# Altium PCB MotorControl-V4.0.PcbDoc (part 2 of 2)
Units mm, origin at the board's own origin, x right, y up, seen from the top; angles counter-clockwise.
Board outline 110 x 100 mm, 4 copper layers (Top Layer, GND-A, VCC-A, Bottom Layer); 241 components, 149 nets, 694 pads, 355 vias.
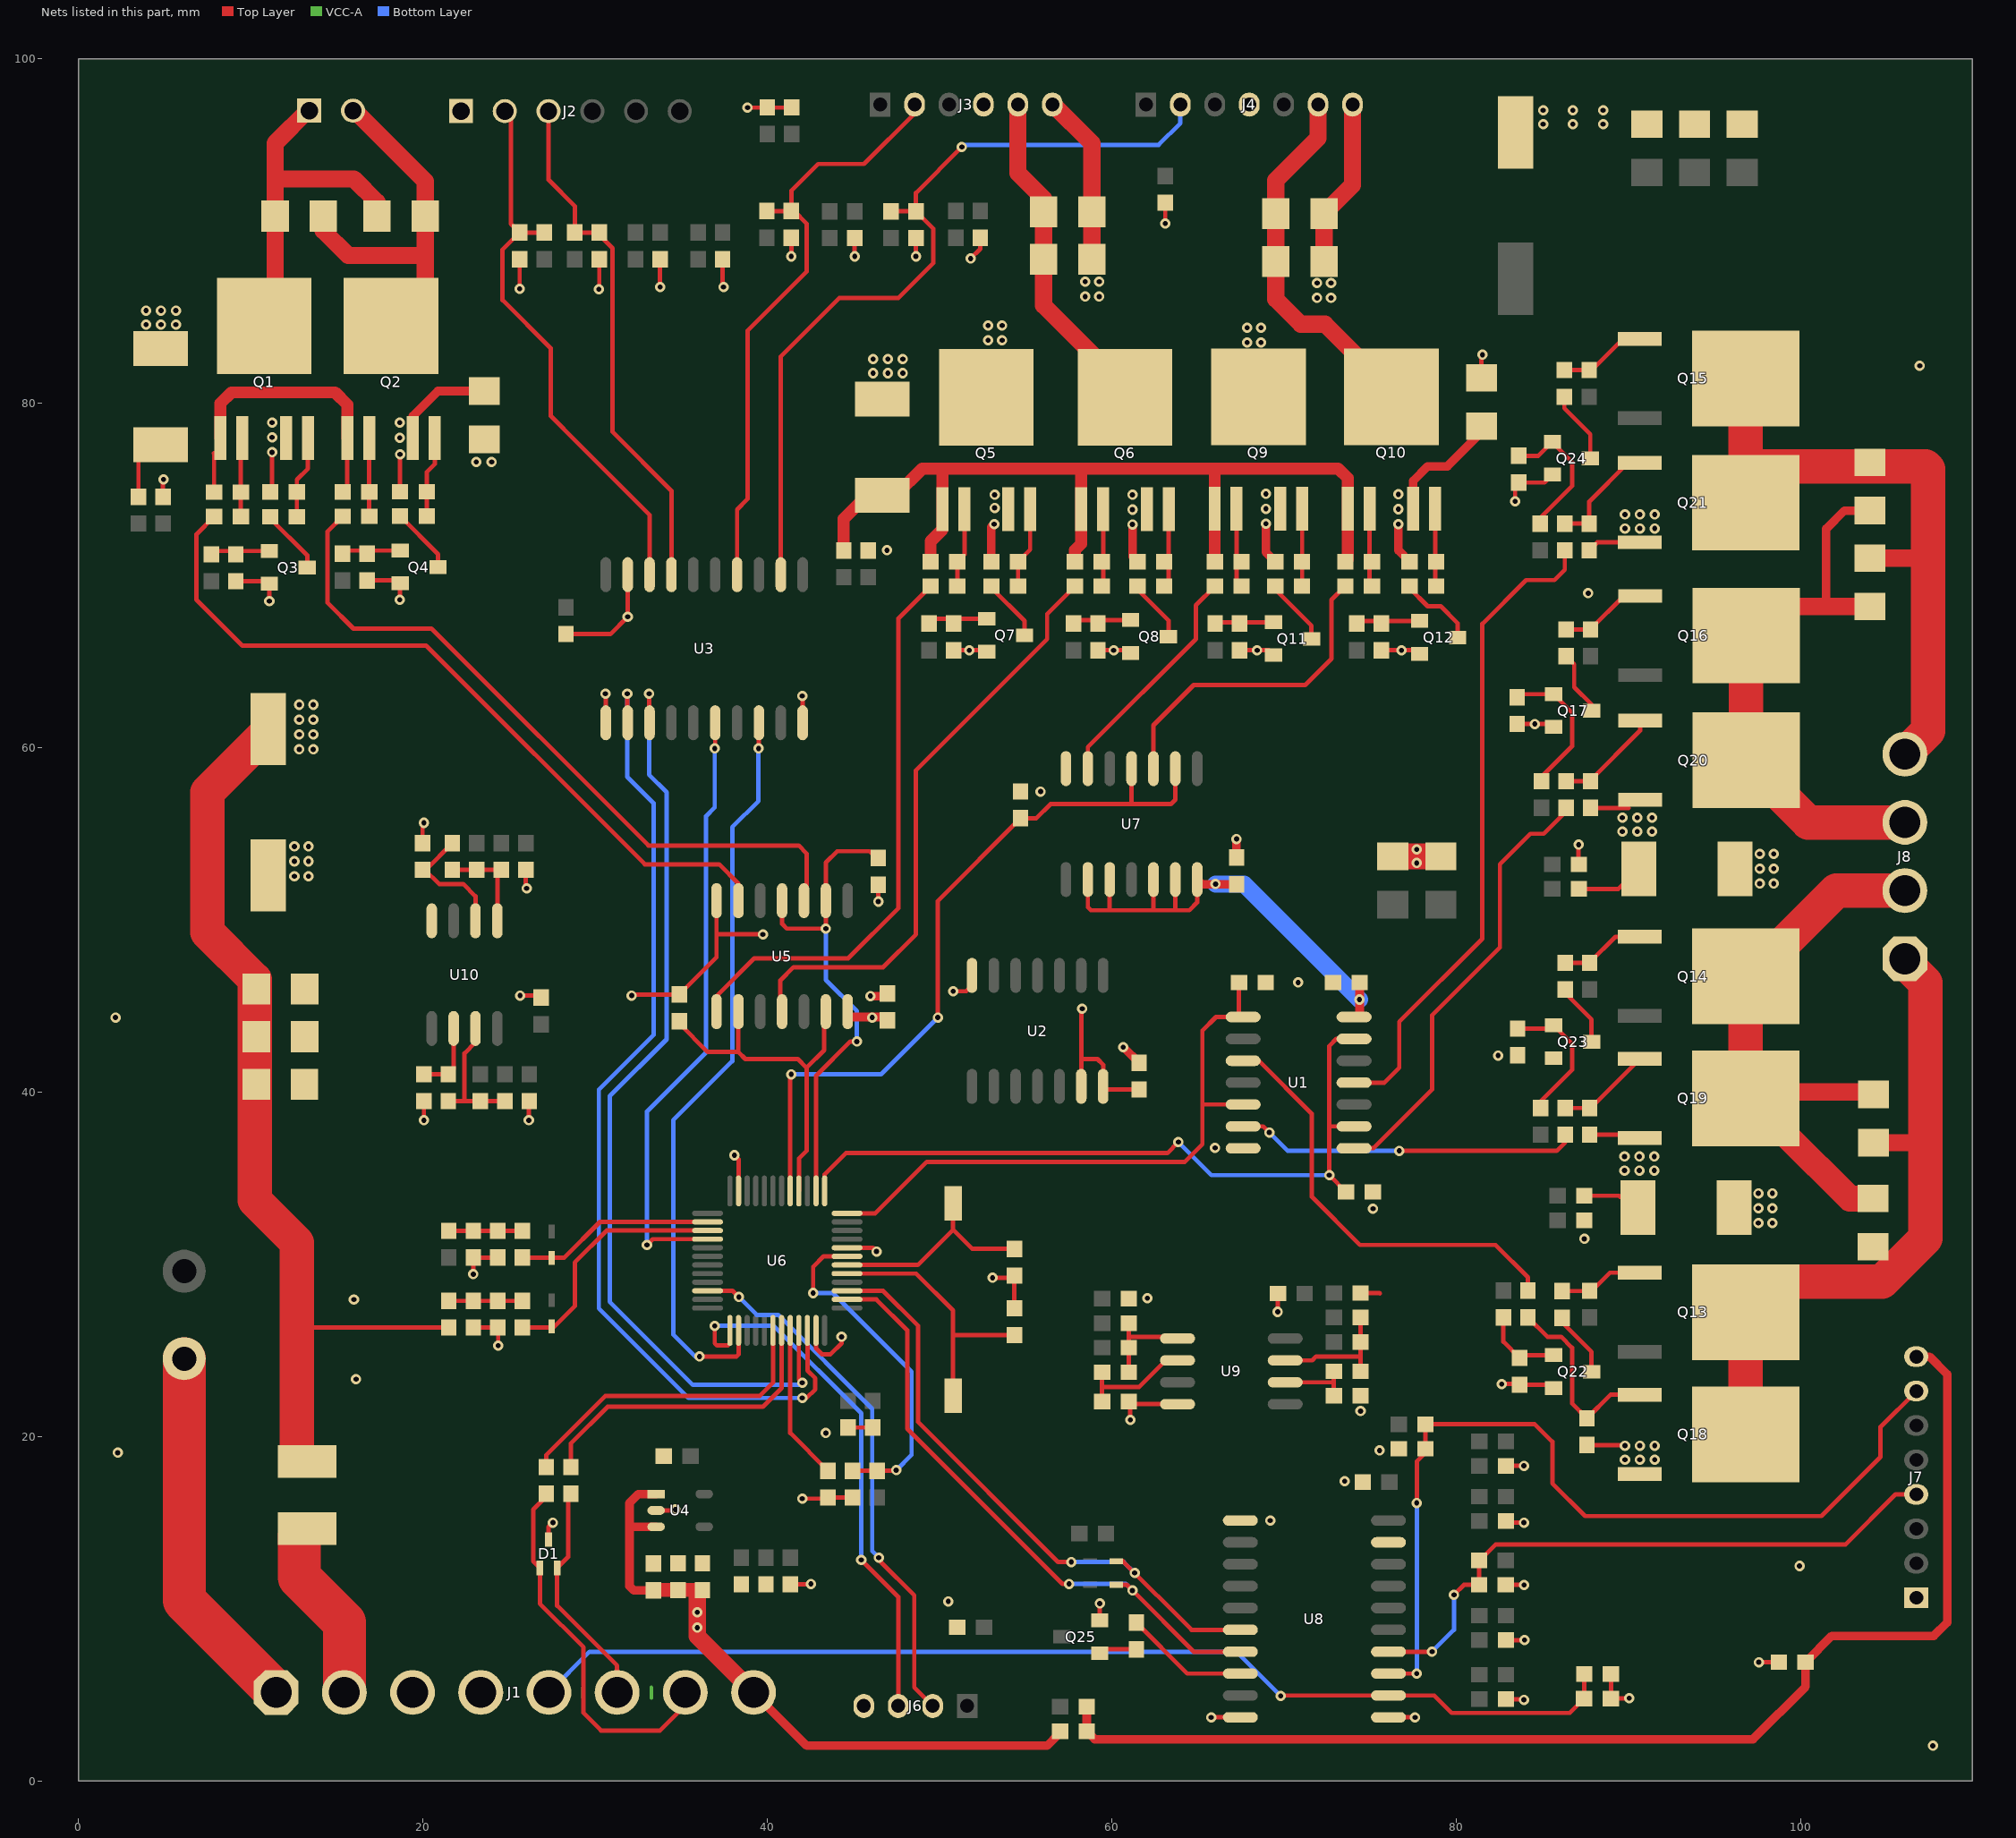
[diagram p4: the nets of this part, all layers, seen from the top]

## Via types
v1: diameter 0.6, hole 0.3, Top Layer to Bottom Layer, 352 vias
v2: diameter 0.6, hole 0.3, Top Layer to Bottom Layer, tented both sides, 3 vias

## Nets (pads, with @x,y where several pads share a name; then routed paths per layer and width w, separated by ;. In a path a pad name is that pad's centre, name@x,y a point inside that pad or via, vN(x,y) a via of type N, cw(c..) or ccw(c..) an arc to the next point about the centre after c; other vN are vias at no path point) (continued)
GND: C1.2 C2.2 C3.2 C4.2 C5.2 C6.2 C7.2 C8.2 C9.2 C10.2 C11.1 C12.1 C13.2 C14.1 C15.2 C16.1 C17.1 C18.2 C19.2 C20.1 C21.2 C22.2 C23.2 C24.2 C25.2 C26.1 C27.1 C29.1 C30.2 C31.2 C32.2 C33.2 C34.2 C35.2 C36.2 C37.2 C38.2 C39.2 C40.2 C41.2 C43.2 C44.2 C46.2 C47.2 C48.2 C49.2 C50.2 C51.2 C52.2 C53.2 C54.2 C57.2 C58.2 C59.2 C60.2 C61.2 C62.2 D1.3 J1.3 J1.4 J2.1 J3.4 J4.4 J6.4 J7.1 Q3.2 Q4.2 Q7.2 Q8.2 Q11.2 Q12.2 Q17.2 Q22.2 Q23.2 Q24.2 Q25.2 R5.1 R6.1 R7.1 R8.2 R11.2 R13.2 R20.2 R24.2 R28.1 R31.2 R32.2 R34.1 R36.1 R53.1 R56.1 R62.1 R71.1 R74.1 R77.2 R84.2 R85.2 R86.1 R87.1 R101.1 R103.1 R106.1 R109.1 R110.1 R120.2 R121.2 R127.1 R128.1 U1.7 U2.7 U3.1 U3.10 U3.19 U4.2 U5.7 U6.8 U6.23 U6.47 U7.7 U8.1 U8.10 U8.11 U8.19 U9.4 U10.4 | length 120.3
  Top Layer w0.254: C25.2@4.917,74.553 v1@4.917,75.474 ; R28.1@9.144,69.659 10.94,69.659 Q3.2@11.092,69.507 v1(11.092,68.496) ; R31.2@16.766,69.7 18.52,69.7 Q4.2@18.687,69.533 18.687,68.598 v1(18.669,68.58) ; R127.1@19.99,54.445 19.99,55.55 v1(20.066,55.626) ; v1(20.066,38.354) R128.1@20.066,39.471 ; C43.2@22.936,26.314 R62.1@24.359,26.314 24.384,26.289 v1(24.384,25.273) ; v1(22.936,29.413) R101.1@22.936,30.378 C49.2@24.359,30.378 ; v1(25.629,86.639) C6.2@25.629,88.354 ; v1(25.654,45.593) 26.759,45.593 C50.2@26.873,45.479 C50.2@26.987,45.593 ; v1@25.984,51.74 C53.2@25.984,52.895 ; v1(26.162,38.354) 26.162,39.446 C54.2@26.187,39.471 ; D1.3@27.305,14.008 27.305,14.732 v1(27.559,14.986) ; C13.2@28.321,66.586 30.899,66.586 v1(31.902,67.589) U3.19@31.902,70.035 ; v1(30.226,86.614) 30.251,86.639 C7.2@30.251,88.354 ; v1(30.607,63.119) 30.632,63.094 U3.1@30.632,61.435 ; v1(32.131,45.593) 32.195,45.657 R20.2@34.9,45.657 37.059,47.816 37.059,49.149 ; U4.2@33.553,15.697 34.62,15.697 v1(34.671,15.748) ; v1(33.782,86.741) C8.2@33.782,88.354 ; U5.7@37.084,51.079 U5.7@37.059,51.105 37.059,49.149 ; C9.2@37.414,88.354 37.414,86.792 v1(37.465,86.741) ; v1(38.1,36.322) 38.339,36.083 U6.23@38.339,34.251 ; v1(38.862,97.155) 41.414,97.155 C60.2@41.427,97.168 ; v1(39.751,49.149) 37.059,49.149 ; C15.2@41.351,11.405 42.52,11.405 v1(42.545,11.43) ; v2(41.402,88.519) C21.2@41.402,89.598 ; v1(42.037,16.383) 43.472,16.383 R34.1@43.536,16.446 C29.1@44.958,16.446 ; v1(42.037,62.992) 42.062,62.967 U3.10@42.062,61.435 ; U6.47@42.839,26.151 42.839,25.106 43.18,24.765 43.688,24.765 44.323,25.4 v1(44.323,25.781) ; U6.8@44.639,30.951 46.138,30.951 v1(46.355,30.734) ; C31.2@44.704,20.51 C30.2@46.152,20.51 ; v2(45.085,88.519) C22.2@45.085,89.585 ; v1(46.457,51.054) R13.2@46.457,52.006 ; v2(48.641,88.519) C23.2@48.641,89.585 ; v1(50.8,45.847) 51.562,45.847 51.892,46.177 U2.7@51.892,46.761 ; R53.1@50.825,65.646 v1(51.74,65.646) 52.672,65.646 Q7.2@52.748,65.57 ; v1(51.816,88.392) 52.375,88.951 C24.2@52.375,89.598 ; v1(53.086,29.21) 54.23,29.21 C27.1@54.356,29.336 C26.1@54.356,27.432 ; R56.1@59.207,65.646 v1(60.122,65.646) 60.953,65.646 Q8.2@61.105,65.494 ; Q25.2@59.317,9.309 v1(59.317,10.295) ; R84.2@60.998,22.022 61.087,21.933 v1(61.087,20.955) ; R84.2@61.151,21.869 U9.4@63.83,21.869 ; v1(63.119,90.424) C58.2@63.119,91.63 ; v1(65.786,3.683) U8.10@67.48,3.683 ; R71.1@67.437,65.646 69.131,65.646 Q11.2@69.41,65.367 ; v1(69.647,27.229) 69.659,27.241 C46.2@69.659,28.296 ; C62.2@74.46,28.321 75.565,28.321 75.59,28.296 ; R74.1@75.667,65.646 77.691,65.646 Q12.2@77.894,65.443 ; U8.11@76.08,3.683 v1(77.622,3.683) ; C39.2@81.483,81.461 81.483,82.855 v1(81.534,82.804) ; v1(82.652,23.038) 83.664,23.038 R103.1@83.702,22.999 85.485,22.999 Q22.2@85.675,22.809 ; C35.2@82.896,11.379 83.951,11.379 v1(83.962,11.369) ; C36.2@82.905,15.077 82.996,14.986 v1(83.947,14.986) ; C33.2@82.908,4.739 83.907,4.739 v1(83.947,4.699) ; C34.2@82.908,8.168 v1(83.987,8.168) ; C37.2@82.908,18.278 82.918,18.288 v1(83.947,18.288) ; v1(83.439,74.295) 83.439,75.175 R109.1@83.651,75.387 85.142,75.387 Q24.2@85.599,75.845 ; R106.1@83.55,61.366 Q17.2@85.498,61.366 ; v1(87.122,54.356) 87.122,53.231 C52.2@87.142,53.211 ; C32.2@88.991,4.765 C32.2@89.002,4.776 ; R36.1@89.002,6.198 C32.2@89.002,4.776 ; v1(90.058,4.79) 89.016,4.79 C32.2@89.002,4.776 ; v1(97.587,6.883) C59.2@98.755,6.883
  Top Layer w0.5: v1(45.999,45.568) 45.999,45.561 46.005,45.555 C20.1@46.99,45.555 ; v1@60.694,42.596 C5.2@61.595,41.694 ; C40.2@67.259,53.607 v1(67.259,54.686)
  Top Layer w1.5: C47.2@76.327,53.673 C48.2@79.121,53.673
  other v1: 107.696,2.032 50.521,10.414 99.949,12.471 69.215,15.113 73.533,17.399 2.286,19.05 75.565,19.177 43.409,20.193 74.46,21.463 16.129,23.317 16.002,27.94 62.078,28.016 87.452,31.471 97.561,32.385 98.374,32.385 75.184,33.223 97.561,33.249 98.374,33.249 97.561,34.112 98.374,34.112 66.015,36.754 82.448,42.113 60.681,42.596 2.159,44.323 70.841,46.355 26.035,51.816 97.638,52.095 98.45,52.095 12.548,52.527 13.36,52.527 97.638,52.959 98.45,52.959 77.724,53.289 12.548,53.391 13.36,53.391 97.638,53.823 98.45,53.823 77.724,54.077 12.548,54.254 13.36,54.254 55.88,57.442 84.582,61.366 68.453,65.646 76.835,65.646 87.681,68.961 46.965,71.45 4.953,75.565 23.114,76.581 24.003,76.581 46.152,81.737 47.015,81.737 47.879,81.737 106.934,82.169 46.152,82.55 47.015,82.55 47.879,82.55 3.937,84.557 4.801,84.557 5.664,84.557 3.937,85.369 4.801,85.369 5.664,85.369 85.065,96.19 86.792,96.19 88.544,96.19 85.065,97.003 86.792,97.003 88.544,97.003
HEAD_IO_L: U3.3 U6.45 | length 55.4
  Top Layer w0.254: v1(33.147,63.119) 33.147,61.461 U3.3@33.172,61.435 ; v1@41.839,23.312 U6.45@41.839,26.151
  Bottom Layer w0.254: 30.861,30.48 30.861,29.972 ; v1(33.147,63.119) 33.147,58.42 34.163,57.404 34.163,43.053 30.861,39.751 30.861,29.972 ; v1(42.037,23.114) 41.91,22.987 35.687,22.987 30.861,27.813 30.861,29.972
HEAD_IO_L1: C7.1 J2.3 R2.1 U3.17 | length 30.8
  Top Layer w0.254: J2.3@27.305,97.003 J2.3@27.305,96.952 27.305,92.964 28.829,91.44 R2.1@28.829,89.904 C7.1@30.251,89.904 30.251,89.764 31.028,88.987 31.028,78.319 34.442,74.905 U3.17@34.442,70.035
HEAD_IO_R: U3.2 U6.46 | length 58
  Top Layer w0.254: v1(31.877,63.119) 31.877,61.461 U3.2@31.902,61.435 ; v1(42.037,22.225) 42.291,22.225 42.794,22.728 42.794,23.373 42.339,23.828 U6.46@42.339,26.151
  Bottom Layer w0.254: 30.226,27.559 30.226,27.432 ; v1(31.877,63.119) 31.877,58.293 33.401,56.769 33.401,43.307 30.226,40.132 30.226,27.432 ; v1(42.037,22.225) 35.433,22.225 30.226,27.432
HEAD_IO_R1: C6.1 J2.2 R1.1 U3.18 | length 34.4
  Top Layer w0.254: J2.2@24.765,96.952 25.121,96.596 25.121,90.412 C6.1@25.629,89.904 ; R1.1@27.051,89.904 C6.1@25.629,89.904 ; 27.686,78.994 28.956,77.724 ; U3.18@33.172,70.035 33.172,73.508 28.956,77.724 ; C6.1@25.629,89.904 24.638,88.913 24.638,85.979 27.432,83.185 27.432,79.248 28.956,77.724
MOT-H-A: C28.2 J5.1 Q1.5 R33.2 | length 21.1
  Top Layer w1: Q1.5@9.776,85.497 Q1.5@10.795,84.478 ; Q1.5@11.427,85.497 R33.2@11.427,90.856 11.427,93.015 ; J5.1@13.411,97.079 11.427,95.095 11.427,93.015 ; C28.2@17.345,90.856 17.345,91.672 16.002,93.015 11.427,93.015
MOT-H-B: C28.1 J5.2 Q2.5 R33.1 | length 21.8
  Top Layer w1: R33.1@14.227,90.856 14.227,90.015 15.672,88.57 20.145,88.57 ; J5.2@15.951,97.079 20.145,92.885 C28.1@20.145,90.856 20.145,88.57 ; Q2.5@18.161,84.478 Q2.5@18.494,84.811 ; Q2.5@20.145,84.811 20.145,88.57
MOT-L-A: C56.2 J8.1 Q13.3 Q18.3 R126.2 | length 35.5
  Top Layer w1: C56.2@104.216,31.01 C56.2@104.216,31.191 ; R126.2@104.242,37.056 106.702,37.056
  Top Layer w2: Q18.3@96.825,20.117 Q13.3@96.825,27.203 ; Q13.3@98.781,28.981 104.75,28.981 107.264,31.496 107.264,46.33 J8.1@106.274,47.32
MOT-L-B: C56.1 J8.2 Q14.3 Q19.3 R126.1 | length 29.5
  Top Layer w1: Q19.3@99.06,40.005 R126.1@103.784,40.005
  Top Layer w1.5: Q19.3@99.136,37.541 102.867,33.81 C56.1@104.216,33.81
  Top Layer w2: Q19.3@96.825,39.624 Q14.3@96.825,46.711 ; Q14.3@97.104,46.711 102.084,51.69 J8.2@106.07,51.69
MOT-R-A: C55.2 J8.3 Q16.3 Q20.3 R125.2 | length 30.9
  Top Layer w0.5: 101.498,68.193 101.498,72.695 102.559,73.756 C55.2@104.038,73.756
  Top Layer w1: Q16.3@98.546,68.193 101.498,68.193 R125.2@104.038,68.193
  Top Layer w2: Q16.3@96.85,66.497 Q20.3@96.85,59.258 100.458,55.65 J8.3@106.07,55.65
MOT-R-B: C55.1 J8.4 Q15.3 Q21.3 R125.1 | length 38.2
  Top Layer w1: R125.1@104.038,70.993 107.213,70.993
  Top Layer w2: Q21.3@96.825,74.219 Q15.3@96.825,81.432 ; Q21.3@96.825,76.327 107.264,76.327 107.417,76.175 107.417,60.956 J8.4@106.07,59.61
MOT-STOP1: C32.1 J1.5 R36.2 U8.12 | length 64.4
  Top Layer w0.254: v1(69.825,4.928) 69.85,4.953 U8.12@76.08,4.953 78.74,4.953 79.756,3.937 86.613,3.937 C32.1@87.441,4.765 87.441,6.187 R36.2@87.452,6.198
  Bottom Layer w0.254: J1.5@27.328,5.131 29.69,7.493 67.259,7.493 v1(69.825,4.928)
MOT-W-LA: C42.2 J3.6 Q5.5 R57.2 | length 10
  Top Layer w1: J3.6@56.562,97.384 58.855,95.091 C42.2@58.855,91.11 R57.2@58.855,88.341
  other v1: 52.832,83.642 53.645,83.642 52.832,84.506 53.645,84.506 58.471,86.182 59.284,86.182 58.471,87.046 59.284,87.046
MOT-W-LB: C42.1 J3.5 Q6.5 R57.1 | length 17.1
  Top Layer w1: J3.5@54.562,97.384 54.562,93.368 56.055,91.875 C42.1@56.055,91.11 R57.1@56.055,88.341 56.055,85.677 Q6.5@59.436,82.296
MOT-W-RA: C45.2 J4.7 Q9.5 R75.2 | length 10.4
  Top Layer w1: Q9.5@68.529,80.363 Q9.5@68.529,80.874 ; C45.2@72.339,88.214 R75.2@72.339,91.008 73.996,92.665 J4.7@73.996,97.384
  other v1: 67.869,83.515 68.682,83.515 67.869,84.379 68.682,84.379 71.933,86.106 72.746,86.106 71.933,86.97 72.746,86.97
MOT-W-RB: C45.1 J4.6 Q10.5 R75.1 | length 19.2
  Top Layer w1: J4.6@71.996,97.384 71.996,95.389 69.539,92.933 C45.1@69.539,88.214 69.539,86.036 70.993,84.582 72.39,84.582 Q10.5@74.549,82.423 ; Q10.5@76.251,80.363 Q10.5@76.251,80.721
NetC26_2: C26.2 U6.5 X1.2 | length 15.6
  Top Layer w0.254: U6.5@44.639,29.451 48.654,29.451 50.8,27.305 50.8,25.908 ; X1.2@50.8,22.352 50.8,25.908 ; C26.2@54.356,25.882 50.826,25.882 50.8,25.908
NetC27_2: C27.2 U6.6 X1.1 | length 12.6
  Top Layer w0.254: U6.6@44.639,29.951 48.747,29.951 50.8,32.004 ; X1.1@50.8,33.528 50.8,32.004 ; C27.2@54.356,30.886 51.918,30.886 50.8,32.004
NetC29_2: C29.2 R35.1 U6.7 | length 20
  Top Layer w0.254: v1(42.672,28.321) 42.672,29.845 43.278,30.451 U6.7@44.639,30.451 ; C29.2@44.958,17.996 R35.1@46.38,17.996 47.46,17.996 v1(47.498,18.034)
  Bottom Layer w0.254: v1(42.672,28.321) 43.815,28.321 48.387,23.749 48.387,18.923 v1(47.498,18.034)
NetC43_1: C43.1 R58.1 R59.2 R62.2 | length 4.3
  Top Layer w0.254: R58.1@21.514,27.864 C43.1@22.936,27.864 R62.2@24.359,27.864 R59.2@25.781,27.864
NetC49_1: C49.1 R92.1 R93.2 R101.2 | length 4.3
  Top Layer w0.254: R92.1@21.514,31.928 R101.2@22.936,31.928 C49.1@24.359,31.928 R93.2@25.781,31.928
NetC59_1: C59.1 J7.8 R64.1 R65.1 | length 71.9
  Top Layer w0.5: R64.1@58.56,4.293 R65.1@58.56,2.87 59.017,2.413 97.257,2.413 100.305,5.461 C59.1@100.305,6.883 101.829,8.407 107.747,8.407 108.534,9.195 108.534,23.597 107.503,24.628 106.934,24.628 J7.8@106.731,24.628
NetQ1_1: Q1.1 Q2.1 R21.2 R22.2 R27.2 R32.1 | length 19.7
  Top Layer w0.254: R27.2@3.495,74.553 R32.1@3.495,76.835 ; 7.874,77.089 7.886,77.077 R22.2@7.886,74.828 ; R21.2@15.356,74.843 15.621,75.109 Q2.1@15.621,77.978
  Top Layer w0.7: Q1.1@8.255,77.978 8.255,79.985 8.89,80.62 14.91,80.62 15.621,79.908 Q2.1@15.621,77.978
NetQ1_2: Q1.2 R22.1 R29.1 | length 4.6
  Top Layer w0.254: R29.1@9.436,73.406 R22.1@9.436,74.828 9.436,77.889 Q1.2@9.525,77.978
NetQ1_4: Q1.4 R9.1 R18.2 | length 4.9
  Top Layer w0.254: R18.2@12.689,73.396 12.689,75.554 13.335,76.2 Q1.4@13.335,77.978
NetQ2_2: Q2.2 R21.1 R30.1 | length 4.6
  Top Layer w0.254: Q2.2@16.891,77.978 16.891,73.436 R30.1@16.906,73.421
NetQ2_4: Q2.4 R10.1 R19.2 | length 4.7
  Top Layer w0.254: R19.2@20.233,73.434 R10.1@20.233,74.856 20.233,75.986 20.701,76.454 Q2.4@20.701,77.978
NetQ3_1: Q3.1 R26.1 R28.2 | length 3.5
  Top Layer w0.254: R26.1@7.722,71.209 7.925,71.412 Q3.1@11.092,71.412
NetQ3_3: Q3.3 R18.1 | length 3.8
  Top Layer w0.254: R18.1@11.139,73.396 11.139,73.316 13.292,71.163 Q3.3@13.292,70.447
NetQ4_1: Q4.1 R25.2 R31.1 | length 3.4
  Top Layer w0.254: R25.2@15.343,71.25 15.531,71.438 Q4.1@18.687,71.438
NetQ4_3: Q4.3 R19.1 | length 3.9
  Top Layer w0.254: R19.1@18.683,73.434 20.887,71.23 Q4.3@20.887,70.472
NetQ5_1: Q5.1 Q6.1 Q9.1 Q10.1 R49.1 R50.1 R67.1 R68.1 R76.2 R77.1 | length 54.1
  Top Layer w0.7: R76.2@44.45,71.436 44.45,73.279 45.822,74.651 R77.1@46.685,74.651 47.473,74.651 49.022,76.2 50.165,76.2 ; R49.1@49.492,70.79 49.492,71.971 50.19,72.669 Q5.1@50.19,73.838 50.19,76.175 50.165,76.2 ; R50.1@57.874,70.79 57.874,71.463 58.242,71.831 Q6.1@58.242,73.838 58.242,76.175 ; R68.1@66.002,70.79 65.989,70.802 Q9.1@65.989,73.863 65.989,76.2 ; R67.1@73.571,70.79 73.711,70.93 Q10.1@73.711,73.863 73.711,75.641 73.152,76.2 65.989,76.2 ; 50.165,76.2 65.989,76.2
NetQ5_2: Q5.2 R49.2 R54.1 | length 4.6
  Top Layer w0.254: R54.1@51.042,69.367 R49.2@51.042,70.79 51.46,71.209 Q5.2@51.46,73.838
NetQ5_4: Q5.4 R45.1 R47.2 | length 4.8
  Top Layer w0.254: R47.2@54.572,69.367 R45.1@54.572,70.79 55.27,71.488 Q5.4@55.27,73.838
NetQ6_2: Q6.2 R50.2 R55.1 | length 4.5
  Top Layer w0.254: R55.1@59.424,69.367 59.512,69.456 Q6.2@59.512,73.838
NetQ6_4: Q6.4 R46.1 R48.2 | length 4.6
  Top Layer w0.254: R48.2@63.056,69.367 63.322,69.634 Q6.4@63.322,73.838
NetQ7_1: Q7.1 R52.1 R53.2 | length 3.5
  Top Layer w0.254: R52.1@49.403,67.196 49.682,67.475 Q7.1@52.748,67.475
NetQ7_3: Q7.3 R47.1 | length 3.7
  Top Layer w0.254: R47.1@53.022,69.367 53.022,69.279 54.948,67.353 Q7.3@54.948,66.51
NetQ8_1: Q8.1 R51.2 R56.2 | length 3.4
  Top Layer w0.254: R51.2@57.785,67.196 57.988,67.399 Q8.1@61.105,67.399
NetQ8_3: Q8.3 R48.1 | length 3.7
  Top Layer w0.254: R48.1@61.506,69.367 61.506,69.177 63.305,67.378 Q8.3@63.305,66.434
NetQ9_2: Q9.2 R68.2 R72.1 | length 4.6
  Top Layer w0.254: Q9.2@67.259,73.863 67.259,69.66 R72.1@67.552,69.367
NetQ9_4: Q9.4 R60.1 R63.2 | length 4.5
  Top Layer w0.254: R63.2@71.057,69.367 71.069,69.38 Q9.4@71.069,73.863
NetQ10_2: Q10.2 R67.2 R73.1 | length 4.6
  Top Layer w0.254: Q10.2@74.981,73.863 74.981,69.507 R73.1@75.121,69.367
NetQ10_4: Q10.4 R61.1 R66.2 | length 4.5
  Top Layer w0.254: Q10.4@78.791,73.863 78.791,69.431 R66.2@78.855,69.367
NetQ11_1: Q11.1 R70.1 R71.2 | length 3.4
  Top Layer w0.254: R70.1@66.015,67.196 66.091,67.272 Q11.1@69.41,67.272
NetQ11_3: Q11.3 R63.1 | length 3.9
  Top Layer w0.254: R63.1@69.507,69.367 69.507,69.177 71.61,67.074 Q11.3@71.61,66.307
NetQ12_1: Q12.1 R69.2 R74.2 | length 3.7
  Top Layer w0.254: R69.2@74.244,67.196 74.396,67.348 Q12.1@77.894,67.348
NetQ12_3: Q12.3 R66.1 | length 4.6
  Top Layer w0.254: R66.1@77.305,69.367 77.305,69.253 78.359,68.199 79.121,68.199 80.094,67.226 Q12.3@80.094,66.383
NetQ13_1: Q13.1 R88.1 R94.2 | length 5
  Top Layer w0.254: R94.2@86.157,28.436 87.872,28.436 88.939,29.503 Q13.1@90.675,29.503
NetQ14_1: Q14.1 R89.1 R95.2 | length 5
  Top Layer w0.254: R95.2@86.344,47.499 87.758,47.499 89.27,49.011 Q14.1@90.675,49.011
NetQ15_1: Q15.1 R91.1 R97.2 | length 5.1
  Top Layer w0.254: R97.2@86.293,81.916 R91.1@87.741,81.916 87.885,81.916 89.701,83.732 Q15.1@90.675,83.732
NetQ16_1: Q16.1 R90.1 R96.2 | length 5.1
  Top Layer w0.254: R96.2@86.394,66.853 87.808,66.853 89.752,68.797 Q16.1@90.7,68.797
NetQ17_1: Q17.1 R99.1 R106.2 | length 8.4
  Top Layer w0.254: R106.2@83.55,62.916 83.727,63.094 Q17.1@85.675,63.094 86.741,62.028 86.741,60.071 84.972,58.302 R99.1@84.972,58.04
NetQ17_3: Q17.3 R96.1 | length 3.8
  Top Layer w0.254: R96.1@86.394,65.303 86.868,64.83 86.868,63.5 87.875,62.493 Q17.3@87.875,62.129
NetQ18_1: Q18.1 R104.1 R112.2 | length 11.4
  Top Layer w0.254: R112.2@84.176,26.911 85.306,25.781 86.106,25.781 86.741,25.146 86.741,21.908 R104.1@87.605,21.044 88.977,22.417 Q18.1@90.675,22.417
NetQ18_2: Q18.2 Q19.2 R104.2 R105.2 R116.1 R120.1 | length 7.3
  Top Layer w0.254: R116.1@87.449,33.973 89.471,33.973 89.535,33.909 ; R104.2@87.605,19.494 v1@89.814,19.494 ; R105.2@87.766,37.516 90.483,37.516 Q19.2@90.675,37.324
  other v1: 89.814,18.644 90.678,18.644 91.542,18.644 89.814,19.456 90.678,19.456 91.542,19.456 89.789,35.433 90.653,35.433 91.516,35.433 89.789,36.246 90.653,36.246 91.516,36.246
NetQ19_1: Q19.1 R105.1 R113.2 | length 5.5
  Top Layer w0.254: R113.2@86.344,39.066 R105.1@87.766,39.066 87.817,39.066 Q19.1@90.675,41.924
NetQ20_1: Q20.1 R107.1 R114.2 | length 6.1
  Top Layer w0.254: R114.2@86.394,58.04 87.758,58.04 90.7,60.982 Q20.1@90.7,61.558
NetQ20_2: Q20.2 Q21.2 R107.2 R108.2 R117.1 R121.1 | length 9.3
  Top Layer w0.254: R117.1@87.142,51.789 89.44,51.789 R121.1@90.611,52.959 ; R108.2@87.741,71.45 88.209,71.919 Q21.2@90.675,71.919 ; R107.2@87.817,56.49 90.018,56.49
  other v1: 89.662,55.118 90.526,55.118 91.389,55.118 89.662,55.931 90.526,55.931 91.389,55.931 89.814,72.72 90.678,72.72 91.542,72.72 89.814,73.533 90.678,73.533 91.542,73.533
NetQ21_1: Q21.1 R108.1 R115.2 | length 6.6
  Top Layer w0.254: R115.2@86.318,73 R108.1@87.741,73 87.741,74.279 89.981,76.519 Q21.1@90.675,76.519
NetQ22_1: Q22.1 R102.1 R103.2 | length 4.8
  Top Layer w0.254: R102.1@82.753,26.911 82.753,25.498 R103.2@83.702,24.549 83.867,24.714 Q22.1@85.675,24.714
NetQ22_3: Q22.3 R94.1 | length 3.8
  Top Layer w0.254: R94.1@86.157,26.886 86.157,26.619 87.875,24.901 Q22.3@87.875,23.749
NetQ23_1: Q23.1 R98.2 R110.2 | length 8.2
  Top Layer w0.254: R110.2@83.575,43.676 85.485,43.676 Q23.1@85.675,43.866 86.741,42.8 86.741,41.275 84.921,39.455 R98.2@84.921,39.066
NetQ23_3: Q23.3 R95.1 | length 3.7
  Top Layer w0.254: R95.1@86.344,45.949 86.344,45.736 87.875,44.205 Q23.3@87.875,42.901
NetQ24_1: Q24.1 R100.2 R109.2 | length 8.3
  Top Layer w0.254: R109.2@83.651,76.937 84.787,76.937 Q24.1@85.599,77.75 85.599,77.723 86.741,76.581 86.741,75.184 84.896,73.339 R100.2@84.896,73
NetQ24_3: Q24.3 R97.1 | length 4.2
  Top Layer w0.254: R97.1@86.293,80.366 86.293,79.696 87.799,78.19 Q24.3@87.799,76.784
NetQ25_1: Q25.1 R130.1 | length 2.2
  Top Layer w0.254: Q25.1@59.317,7.404 59.545,7.632 R130.1@61.443,7.632
NetR34_2: R34.2 U6.44 | length 9.1
  Top Layer w0.254: U6.44@41.339,26.151 41.339,20.193 R34.2@43.536,17.996
NetR78_2: R78.2 R79.1 R82.1 U9.1 | length 5.7
  Top Layer w0.254: R82.1@60.998,23.724 60.998,25.781 ; R79.1@60.998,26.568 60.998,25.781 ; U9.1@63.83,25.679 63.729,25.781 60.998,25.781
NetR80_2: R80.2 R81.2 R83.1 U9.7 | length 7.6
  Top Layer w0.254: U9.7@70.083,24.409 71.653,24.409 71.882,24.638 74.46,24.638 ; R83.1@74.46,23.774 74.46,24.638 ; R81.2@74.46,26.899 R80.2@74.46,25.476 74.46,24.638
NetR82_2: R82.2 R84.1 U9.2 | length 6.7
  Top Layer w0.254: R84.1@59.448,22.022 59.448,22.86 ; R82.2@59.448,23.724 59.448,22.86 ; U9.2@63.83,24.409 63.144,24.409 61.595,22.86 59.448,22.86
NetR83_2: R83.2 R85.1 U9.6 | length 4.3
  Top Layer w0.254: U9.6@70.083,23.139 72.885,23.139 72.91,23.114 ; R85.1@72.91,22.352 72.91,23.114 ; R83.2@72.91,23.774 72.91,23.114
NetR111_1: R111.1 R118.1 R123.2 U10.1 | length 5.8
  Top Layer w0.254: R123.2@21.717,52.895 R111.1@23.139,52.895 R118.1@24.562,52.895 24.333,52.667 U10.1@24.333,49.987
NetR119_1: R119.1 R122.2 R124.2 U10.7 | length 7.8
  Top Layer w0.254: R124.2@21.488,39.471 R119.1@23.343,39.471 R122.2@24.765,39.471 ; 22.428,39.471 22.428,42.24 23.063,42.875 U10.7@23.063,43.683
NetR123_1: R123.1 R127.2 U10.2 | length 7.3
  Top Layer w0.254: R127.2@19.99,52.895 20.13,52.895 20.955,52.07 22.352,52.07 23.063,51.359 U10.2@23.063,49.987 ; R127.2@20.167,52.895 R123.1@21.717,54.445
NetR124_1: R124.1 R128.2 U10.6 | length 4.2
  Top Layer w0.254: R128.2@20.066,41.021 R124.1@21.488,41.021 21.793,41.326 U10.6@21.793,43.683
NetR130_2: R130.2 U8.8 | length 7.3
  Top Layer w0.254: R130.2@61.443,9.182 64.402,6.223 U8.8@67.48,6.223
PWM-1-A: R112.1 U1.3 | length 25.3
  Top Layer w0.254: U1.3@67.64,41.808 68.555,41.808 71.628,38.735 71.628,33.909 74.422,31.115 82.296,31.115 84.176,29.235 R112.1@84.176,28.461
PWM-1-B: R113.1 U1.6 | length 19.9
  Top Layer w0.254: U1.6@67.64,37.998 68.809,37.998 v1(69.164,37.643) ; v1(76.708,36.576) 85.852,36.576 86.344,37.068 R113.1@86.344,37.516
  Bottom Layer w0.254: v1(69.164,37.643) 70.231,36.576 v1(76.708,36.576)
PWM-2-A: R114.1 U1.8 | length 26
  Top Layer w0.254: U1.8@74.083,36.728 75.209,36.728 78.613,40.132 78.613,44.45 82.55,48.387 82.55,53.213 84.328,54.991 85.09,54.991 86.394,56.295 R114.1@86.394,56.49
PWM-2-B: R115.1 U1.11 | length 38
  Top Layer w0.254: U1.11@74.083,40.538 75.844,40.538 76.708,41.402 76.708,44.069 81.534,48.895 81.534,67.183 84.074,69.723 85.725,69.723 86.318,70.316 R115.1@86.318,71.45
PWM-3-A: R29.2 U5.6 | length 44.5
  Top Layer w0.254: R29.2@7.886,73.406 6.858,72.378 6.858,68.58 9.525,65.913 20.193,65.913 32.893,53.213 37.211,53.213 38.329,52.095 U5.6@38.329,51.105
PWM-3-B: R30.2 U5.3 | length 42.1
  Top Layer w0.254: R30.2@15.356,73.421 14.478,72.543 14.478,68.402 15.977,66.904 20.505,66.904 33.103,54.305 41.834,54.305 42.291,53.848 U5.3@42.291,50.927
PWM-4-A: R54.2 U5.8 | length 33.1
  Top Layer w0.254: U5.8@37.059,44.662 37.084,44.687 37.084,45.593 39.243,47.752 44.704,47.752 47.625,50.673 47.625,67.501 R54.2@49.492,69.367
PWM-4-B: R55.2 U5.11 | length 34.9
  Top Layer w0.254: U5.11@40.869,44.662 40.767,44.763 40.767,46.482 41.529,47.244 46.736,47.244 48.641,49.149 48.641,58.674 56.261,66.294 56.261,67.755 R55.2@57.874,69.367
PWM-5-A: R72.2 U7.6 | length 13.6
  Top Layer w0.254: U7.6@58.623,58.776 58.623,60.02 64.897,66.294 64.897,68.263 R72.2@66.002,69.367
PWM-5-B: R73.2 U7.3 | length 19
  Top Layer w0.254: U7.3@62.433,58.776 62.433,61.29 64.77,63.627 71.247,63.627 72.771,65.151 72.771,68.568 R73.2@73.571,69.367
PWM-IO-1: R8.1 U1.1 U1.5 U6.12 | length 36.1
  Top Layer w0.254: U6.12@44.639,32.951 45.72,32.951 45.905,32.951 46.286,32.951 49.276,35.941 64.262,35.941 65.278,36.957 65.278,39.268 ; R8.1@67.399,46.355 67.399,44.59 U1.1@67.64,44.348 66.065,44.348 65.278,43.561 65.278,39.268 ; U1.5@67.64,39.268 65.278,39.268
PWM-IO-2: R11.1 U1.9 U1.13 U6.13 | length 44
  Top Layer w0.254: U6.13@43.339,34.251 43.339,35.211 44.577,36.449 54.102,36.449 ; 54.356,36.449 54.102,36.449 ; v1(63.881,37.084) 63.246,36.449 54.102,36.449 ; R11.1@73.622,34.188 v1(72.644,35.166) 72.644,37.998 ; U1.9@74.083,37.998 72.644,37.998 ; U1.13@74.083,43.078 73.05,43.078 72.644,42.672 72.644,37.998
  Bottom Layer w0.254: v1(63.881,37.084) 65.799,35.166 v1(72.644,35.166)
PWM-IO-3: R13.1 U5.2 U5.4 U6.14 | length 28.8
  Top Layer w0.254: U5.4@40.869,51.105 40.869,49.759 41.148,49.479 v1(43.409,49.479) U5.2@43.409,51.105 43.409,53.315 44.069,53.975 45.936,53.975 R13.1@46.59,53.321 ; U6.14@42.839,34.251 42.839,40.934 44.831,42.926 v1(45.212,42.926)
  Bottom Layer w0.254: v1@43.434,49.454 v1(43.409,49.479) 43.409,46.507 45.212,44.704 v1(45.212,42.926)
PWM-IO-4: R20.1 U5.9 U5.13 U6.16 | length 21.4
  Top Layer w0.254: R20.1@34.9,44.107 34.9,43.967 36.551,42.316 38.329,42.316 ; U5.9@38.329,44.662 38.329,42.316 ; U6.16@41.839,34.251 41.862,34.274 41.862,36.147 42.291,36.576 42.291,41.402 ; U5.13@43.307,44.069 43.307,42.418 42.291,41.402 ; U5.13@43.409,44.662 U5.13@43.434,44.636 ; 38.329,42.316 38.735,41.91 41.783,41.91 42.291,41.402
PWM-IO-5: R24.1 U6.17 U7.2 U7.4 | length 43.5
  Top Layer w0.254: U6.17@41.339,34.251 41.339,40.958 v1(41.402,41.021) ; v1(49.911,44.323) 49.911,51.092 R24.1@54.712,55.892 55.638,55.892 56.464,56.718 61.163,56.718 ; U7.4@61.163,58.776 61.163,56.718 ; U7.2@63.703,58.776 63.703,56.972 63.449,56.718 61.163,56.718
  Bottom Layer w0.254: v1(41.402,41.021) 46.609,41.021 v1(49.911,44.323)
SEN1: D2.1 R59.1 U6.27 | length 14.6
  Top Layer w0.254: R59.1@25.781,26.314 27.584,26.314 28.829,27.559 28.829,30.099 30.681,31.951 U6.27@36.539,31.951
SEN2: D5.1 R93.1 U6.26 | length 11.6
  Top Layer w0.254: R93.1@25.781,30.378 28.219,30.378 30.292,32.451 U6.26@36.539,32.451
SWCLK: J6.3 U6.37 | length 31.3
  Top Layer w0.254: v1(36.957,26.416) 36.957,25.4 37.084,25.273 37.719,25.273 37.839,25.393 U6.37@37.839,26.151 ; v1(45.466,12.827) 47.616,10.677 J6.3@47.616,4.343
  Bottom Layer w0.254: v1(36.957,26.416) 40.386,26.416 45.466,21.336 v1(45.466,12.827)
SWDIO: J6.2 U6.34 | length 31.2
  Top Layer w0.254: U6.34@36.539,28.451 37.996,28.451 v1(38.354,28.092) ; v1(46.482,12.954) 46.609,12.954 46.609,12.7 48.543,10.766 48.543,5.416 J6.2@49.616,4.343
  Bottom Layer w0.254: v1(38.354,28.092) 39.395,27.051 40.64,27.051 46.101,21.59 46.101,13.335 v1(46.482,12.954)
UART1RX: R23.1 U6.43 | length 18.4
  Top Layer w0.254: R23.1@28.52,18.293 R23.1@28.6,18.213 28.6,19.583 30.734,21.717 39.751,21.717 40.839,22.805 U6.43@40.839,26.151
UART1RX-J: D1.2 J1.6 R23.2 | length 13.3
  Top Layer w0.254: R23.2@28.6,16.663 28.448,16.51 28.448,13.001 D1.2@27.805,12.358 27.805,10.168 31.288,6.685 J1.6@31.288,5.131
UART1TX: R12.1 U6.42 | length 18.6
  Top Layer w0.254: R12.1@27.178,18.213 27.178,18.923 30.607,22.352 39.577,22.352 40.339,23.114 U6.42@40.339,26.151
UART1TX-J: D1.1 J1.7 R12.2 | length 21.9
  Top Layer w0.254: R12.2@27.178,16.663 27.178,16.51 26.416,15.748 26.416,12.747 D1.1@26.805,12.358 26.805,10.279 29.337,7.747 29.337,3.937 30.353,2.921 33.782,2.921 35.248,4.387 J1.7@35.248,5.131
VCC-5V: C5.1 C10.1 C11.2 C12.2 C14.2 C20.2 C40.1 J1.8 R65.2 U1.14 U2.13 U2.14 U4.1 U4.3 U5.14 U7.9 U7.10 U7.12 U7.13 U7.14 | length 84.6
  Top Layer w0.254: C11.2@33.401,11.061 36.233,11.061 C14.2@36.246,11.074 ; U2.13@58.242,40.318 v1@58.242,44.831 ; 58.242,41.91 59.182,41.91 59.512,41.58 U2.14@59.512,40.318 59.686,40.144 C5.1@61.595,40.144 ; U7.9@58.623,52.333 58.623,50.724 58.801,50.546 64.516,50.546 64.973,51.003 U7.14@64.973,52.333 ; 59.893,50.597 U7.10@59.893,52.333 ; U7.12@62.433,52.333 62.433,50.597 62.484,50.546 ; 63.627,50.546 63.703,50.622 U7.13@63.703,52.333
  Top Layer w0.5: 32.004,14.732 32.019,14.747 U4.3@33.553,14.747 ; C11.2@33.401,11.061 32.246,11.061 32.004,11.303 32.004,16.129 32.522,16.647 U4.1@33.553,16.647 ; J1.8@39.208,5.131 42.307,2.032 56.261,2.032 R65.2@56.896,2.667 ; U5.14@44.679,44.348 45.72,44.348 C20.2@46.74,44.348 ; U7.14@64.973,52.333 65.249,52.057 C40.1@67.259,52.057 ; U1.14@74.41,44.399 C10.1@74.41,46.355
  Top Layer w0.8: C11.2@33.401,11.061 33.413,11.074 C14.2@36.246,11.074
  Top Layer w1: C14.2@35.941,10.795 35.941,8.398 J1.8@39.208,5.131
  VCC-A w0.203: 29.308,4.838 29.308,5.424 ; 33.268,5.424 33.274,5.418 33.274,4.8
  Bottom Layer w1: v1(66.04,52.07) 67.691,52.07 v1(74.397,45.364)
  other v1: 35.941,8.89 35.941,9.779 46.101,44.323 58.293,44.831
VCC-22V: F2.2 J1.2 | length 10.2
  Top Layer w2.5: F2.2@12.827,14.224 12.827,11.811 15.448,9.19 J1.2@15.448,5.131
VCC-22V-O: C2.1 C4.1 C18.1 C39.1 F2.1 Q1.3 Q2.3 Q5.3 Q6.3 Q9.3 Q10.3 R6.2 R7.2 R9.2 R10.2 R45.2 R46.2 R58.2 R60.2 R61.2 | length 81
  Top Layer w0.254: R9.2@11.141,74.833 11.252,74.945 v1(11.252,77.14) ; 13.462,26.314 R58.2@21.514,26.314 ; R10.2@18.683,74.856 v1(18.683,77.024)
  Top Layer w0.5: Q2.3@19.431,77.978 19.431,79.248 20.882,80.699 C4.1@23.571,80.699 ; R58.2@21.488,26.289 R58.2@21.514,26.314 ; R45.2@53.022,70.79 53.022,72.809 v1(53.188,72.974) ; v1(61.214,72.949) 61.214,71.082 R46.2@61.506,70.79 ; v1(68.961,73) 68.961,71.336 R60.2@69.507,70.79 ; v1(76.657,72.974) 76.657,71.437 R61.2@77.305,70.79 ; Q10.3@77.521,73.863 77.521,75.489 78.359,76.327 79.502,76.327 81.483,78.308 C39.1@81.483,78.661
  Top Layer w2: C2.1@11.024,61.07 11.024,60.935 7.493,57.404 7.493,49.276 10.236,46.533 10.236,43.205 10.236,33.706 12.7,31.242 12.7,25.273 F2.1@12.7,18.796
  other v1: 12.827,59.893 13.64,59.893 12.827,60.757 13.64,60.757 12.827,61.62 13.64,61.62 12.827,62.484 13.64,62.484 61.214,73.812 76.657,73.838 68.961,73.863 53.213,73.914 53.213,74.676 61.214,74.676 76.657,74.701 68.961,74.727 18.669,77.978 11.252,78.003 11.252,78.867 18.669,78.867
VCC-24V: F1.2 J1.1 | length 21.6
  Top Layer w2.5: F1.2@6.147,24.511 6.147,10.472 J1.1@11.488,5.131
W_IO_L: U3.6 U6.28 | length 35.9
  Top Layer w0.254: v1(33.02,31.115) 33.356,31.451 U6.28@36.539,31.451 ; v1(36.957,59.944) 36.982,59.969 U3.6@36.982,61.435
  Bottom Layer w0.254: v1(33.02,31.115) 33.02,38.862 36.449,42.291 36.449,43.18 ; 36.449,42.926 36.449,43.18 ; v1(36.957,59.944) 36.957,56.515 36.449,56.007 36.449,43.18
W_IO_L1: C21.1 J3.2 R14.1 U3.14 | length 35.4
  Top Layer w0.254: U3.14@38.252,70.035 38.252,73.812 38.862,74.422 38.862,84.201 42.291,87.63 42.291,90.424 41.567,91.148 C21.1@41.402,91.148 ; R14.1@39.98,91.148 C21.1@41.402,91.148 ; J3.2@48.562,97.384 48.562,96.822 45.623,93.883 42.956,93.883 41.402,92.329 C21.1@41.402,91.148
W_IO_R: U3.8 U6.38 | length 43.4
  Top Layer w0.254: v1(36.068,24.638) 38.227,24.638 38.339,24.75 U6.38@38.339,26.151 ; v1(39.497,59.944) 39.522,59.969 U3.8@39.522,61.435
  Bottom Layer w0.254: v1(36.068,24.638) 35.814,24.638 34.544,25.908 34.544,38.354 37.973,41.783 37.973,55.372 39.497,56.896 v1(39.497,59.944)
W_IO_R1: C23.1 J4.2 R16.1 U3.12 | length 47.7
  Top Layer w0.254: U3.12@40.792,70.035 40.792,82.702 44.196,86.106 47.625,86.106 49.657,88.138 49.657,90.119 C23.1@48.641,91.135 ; R16.1@47.193,91.135 C23.1@48.641,91.135 ; v1(51.308,94.869) 48.641,92.202 C23.1@48.641,91.135
  Bottom Layer w0.254: v1@51.435,94.996 62.738,94.996 63.996,96.254 J4.2@63.996,97.333 J4.2@63.996,97.384
WHEEL-FLOAT-L: D4.2 U6.3 U8.6 | length 35.6
  Top Layer w0.254: U6.3@44.639,28.451 46.733,28.451 48.768,26.416 48.768,20.828 56.896,12.7 v1(57.658,12.7) ; D4.2@60.274,12.751 60.655,12.751 64.643,8.763 U8.6@67.48,8.763
  Bottom Layer w0.254: v1(57.658,12.7) 60.706,12.7 v1(61.341,12.065)
WHEEL-FLOAT-L1: C35.1 J7.4 R39.1 U8.14 | length 36.5
  Top Layer w0.254: U8.14@76.08,7.493 v1(78.613,7.493) ; v1(79.883,10.795) 80.467,11.379 C35.1@81.346,11.379 R39.1@81.346,12.802 81.382,12.802 82.296,13.716 102.616,13.716 105.528,16.628 J7.4@106.731,16.628
  Bottom Layer w0.254: v1(78.613,7.493) 79.883,8.763 v1(79.883,10.795)
WHEEL-FLOAT-R: D3.2 U6.2 U8.7 | length 35.7
  Top Layer w0.254: U6.2@44.639,27.951 46.344,27.951 48.133,26.162 48.133,20.447 57.15,11.43 v1(57.531,11.43) ; D3.2@60.274,11.379 60.884,11.379 v1(61.214,11.049) 64.77,7.493 U8.7@67.48,7.493
  Bottom Layer w0.254: v1(57.531,11.43) 60.833,11.43 v1(61.214,11.049)
WHEEL-FLOAT-R1: C38.1 J7.7 R42.1 U8.13 | length 52.2
  Top Layer w0.254: U8.13@76.08,6.223 v1(77.724,6.223) ; v1(77.724,16.129) 77.724,18.542 78.232,19.05 R42.1@78.232,20.447 ; R42.1@78.232,20.701 84.582,20.701 85.598,19.685 85.598,17.272 87.503,15.367 101.219,15.367 104.648,18.796 104.648,20.545 J7.7@106.731,22.628
  Bottom Layer w0.254: v1(77.724,6.223) v1(77.724,16.129)
pads on no net: J4.5 U2.12 U4.4 U6.15 U6.25 U7.8 U7.11 U8.9
copper on no net: | length 75.4
  Bottom Layer w0.2: 8,5 ccw(c5,5) 8,5 ; 8,95 ccw(c5,95) 8,95 ; 108,5 ccw(c105,5) 108,5 ; 108,95 ccw(c105,95) 108,95

## Polygon pours and split planes (outlines as drawn)
GND on Top Layer "Top Layer-No Net" (hatched 90Degree grid 0.178 track 0.203, remove dead copper, pour order 1003): -8.509,104.521 -8.509,1.143 6.477,-13.843 112.014,-13.843 121.285,-4.572 121.285,98.679 113.411,106.553 -6.477,106.553 -8.509,104.521
GND on GND-A "Top Layer-No Net" (hatched 90Degree grid 0.178 track 0.203, remove dead copper, pour order 1002): -3.937,-2.54 108.585,-2.54 117.221,6.096 117.221,102.235 110.871,108.585 1.524,108.585 -5.207,101.854
VCC-22V-O on VCC-A "Top Layer-No Net" (hatched 90Degree grid 0.178 track 0.203, remove dead copper, pour order 1005): 9.652,76.327 9.652,79.248 10.922,80.518 14.605,84.201 16.764,84.201 71.374,84.201 76.708,78.867 77.851,77.724 77.851,72.39 77.216,71.755 74.93,71.755 18.161,71.755 15.367,68.961 14.605,68.199 14.605,59.563 13.97,58.928 10.668,58.928 10.287,59.309 9.652,59.944 9.652,76.327
3.3V on VCC-A "Top Layer-No Net" (hatched 90Degree grid 0.178 track 0.203, remove dead copper, pour order 1006): 42.037,7.112 42.037,3.175 43.053,2.159 48.895,2.159 84.074,2.159 85.852,3.937 86.233,4.318 86.233,9.144 86.233,20.828 81.28,25.781 65.405,41.656 36.703,41.656 32.893,37.846 32.893,33.274 32.893,16.637 36.322,13.208 42.037,7.493 42.037,7.112
24V on VCC-A "Top Layer-No Net" (hatched 90Degree grid 0.178 track 0.203, remove dead copper, pour order 1004): 1.143,63.246 1.143,85.852 8.128,92.837 8.636,93.345 18.415,93.345 91.44,93.345 93.599,91.186 96.647,88.138 96.647,76.327 96.647,26.67 93.726,23.749 90.551,23.749 89.535,23.749 88.773,24.511 88.773,31.623 88.773,79.629 84.328,84.074 82.931,85.471 60.452,85.471 13.843,85.471 9.525,81.153 8.128,79.756 8.128,72.009 8.128,63.5 6.985,62.357 2.032,62.357 1.143,63.246
VCC-5V on VCC-A "Top Layer-No Net" (hatched 90Degree grid 0.178 track 0.203, remove dead copper, pour order 1000): 41.021,5.969 41.021,3.175 40.259,2.413 40.005,2.159 38.1,2.159 26.416,2.159 25.273,3.302 25.146,3.429 25.146,8.255 25.146,11.938 21.59,15.494 21.59,52.578 26.543,57.531 27.559,58.547 44.069,58.547 65.278,58.547 68.834,54.991 68.834,45.593 67.945,44.704 66.294,43.053 58.928,43.053 35.814,43.053 32.004,39.243 31.623,38.862 31.623,29.718 31.623,15.748 35.306,12.065 41.021,6.35 41.021,5.969
24V on Bottom Layer "Bottom Layer-No Net" (solid, remove dead copper, pour order 1010): 77.343,52.07 83.82,52.07 85.725,50.165 86.233,49.657 89.154,49.657 91.821,49.657 92.202,49.276 93.218,48.26 93.218,47.117 93.218,45.593 92.837,45.212 91.948,44.323 91.313,44.323 87.884,44.323 85.852,46.355 82.423,49.784 79.883,49.784 77.216,49.784 76.835,50.165 76.581,50.419 76.581,50.927 76.581,51.689 76.962,52.07
VCC-22V-O on Bottom Layer "Bottom Layer-No Net" (solid, remove dead copper, pour order 1009): 10.414,78.657 10.414,78.896 10.946,79.295 11.052,79.375 14.348,79.375 18.92,79.375 19.026,79.295 19.558,78.896 19.558,78.417 19.558,76.82 19.345,76.661 19.239,76.581 16.794,76.581 10.839,76.581 10.414,76.9
NetQ20_2 on Bottom Layer "Bottom Layer-No Net" (solid, remove dead copper, pour order 1008): 88.748,56.134 89.332,56.718 90.551,56.718 91.516,56.718 91.897,57.099 92.735,57.937 92.735,66.37 92.735,70.688 92.151,71.272 91.77,71.653 91.008,71.653 89.433,71.653 89.103,71.984 88.875,72.212 88.875,73.431 88.875,74.193 89.306,74.625 89.611,74.93 91.542,74.93 93.624,74.93 94.64,73.914 96.215,72.339 96.215,61.493 96.215,55.321 95.606,54.712 95.326,54.432 90.068,54.432 89.154,54.432 88.748,54.839
NetQ18_2 on Bottom Layer "Bottom Layer-No Net" (solid, remove dead copper, pour order 1007): 89.788,20.168 91.009,20.168 91.861,21.107 93.382,22.784 93.382,25.349 93.382,33.553 92.806,34.188 92.368,34.671 91.838,34.671 89.995,34.671 89.673,35.027 89.465,35.255 89.465,36.322 89.465,37.008 89.88,37.465 90.156,37.77 91.7,37.77 94.004,37.77 94.349,37.389 96.215,35.331 96.215,24.994 96.215,18.618 95.155,17.45 94.81,17.069 92.207,17.069 89.857,17.069 89.419,17.551 89.281,17.704 89.281,19.787 89.627,20.168 89.788,20.168
GND on Bottom Layer "Top Layer-No Net" (hatched 90Degree grid 0.178 track 0.203, remove dead copper, pour order 1001): 10.033,-3.302 109.982,-3.302 120.396,7.112 120.396,96.774 106.172,110.998 3.302,110.998 2.032,109.728 -5.207,102.489 -5.207,86.106 -5.207,2.794 1.27,-3.683

## Keep-outs
Keep-Out Layer:
  circle w0.2: c5,5 r1.6
  circle w0.2: c5,95 r1.6
  circle w0.2: c105,5 r2.1
  circle w0.2: c105,95 r2.1
  lines w0.2: 0,0 0,100 110,100 110,0 0,0

## Other copper
Top Layer:
  rectangle net VCC-22V-O: 11.684,59.055 14.097,63.119
  rectangle net 24V: 93.98,92.583 96.266,94.234
  rectangle net GND: 22.733,76.2 24.384,77.724
  rectangle net VCC-22V-O: 10.897,76.708 12.446,79.273
  rectangle net VCC-22V-O: 18.237,76.683 19.787,79.248
  rectangle net VCC-22V-O: 52.832,72.542 54.381,75.108
  rectangle net VCC-22V-O: 60.858,72.542 62.408,75.108
  rectangle net VCC-22V-O: 68.631,72.593 70.18,75.159
  rectangle net VCC-22V-O: 76.352,72.568 77.902,75.133
  region net 24V: 91.948,78.715 91.948,81.051 89.408,81.051 89.408,78.715
  region net NetQ20_2: 91.948,71.526 91.948,73.863 89.408,73.863 89.408,71.526
  region net 24V: 91.973,63.83 91.973,66.167 89.433,66.167 89.433,63.83
  region net 24V: 91.948,44.018 91.948,46.355 89.408,46.355 89.408,44.018
  region net NetQ18_2: 91.948,31.648 91.948,37.694 89.408,37.694 89.408,31.648
  region net 24V: 91.948,24.511 91.948,26.848 89.408,26.848 89.408,24.511
  region net NetQ18_2: 91.948,17.424 91.948,19.761 89.408,19.761 89.408,17.424
  rectangle net NetQ1_1: 5.766,76.581 8.636,78.613
  rectangle net GND: 3.175,84.099 6.35,85.674
  rectangle net MOT-W-LA: 58.039,85.827 59.639,87.528
  rectangle net MOT-W-LA: 52.426,82.601 54.051,84.887
  rectangle net MOT-W-RA: 71.552,85.801 73.152,87.503
  rectangle net MOT-W-RA: 67.412,82.982 69.088,84.684
  rectangle net GND: 45.11,80.975 48.26,82.855
  region net GND: 13.716,54.661 11.709,54.661 11.709,51.816 13.716,51.816
  region net NetQ20_2: 89.205,57.277 89.611,57.683 91.821,57.683 92.202,57.302 92.202,51.638 91.643,51.079 89.535,51.079 89.205,51.41
  region net GND: 96.749,34.747 98.12,34.747 98.73,34.138 98.73,32.334 98.196,31.801 96.952,31.801
  region net GND: 96.698,51.486 98.222,51.486 98.755,52.019 98.755,53.899 98.222,54.432 97.028,54.432
  region net 24V: 82.461,89.192 88.024,94.755 94.196,94.755 94.755,94.196 94.755,90.843 94.272,90.361 91.123,90.361 85.915,85.153 82.461,85.153
Bottom Layer:
  region net MOT-W-LA: 52.527,84.176 52.527,85.141 54.737,87.351 59.36,87.351 59.538,87.173 59.538,85.928 59.36,85.75 55.474,85.75 53.95,84.226 53.95,83.261 53.848,83.16 52.578,83.16
  region net MOT-W-RA: 67.513,85.395 69.317,87.198 72.873,87.198 73.05,87.02 73.05,85.928 73,85.877 69.875,85.877 68.986,84.988 68.986,83.236 68.885,83.134 67.64,83.134 67.513,83.261

## Silkscreen, mask and mechanical layers (free items; w line width, h text height)
Top Overlay:
  circle w0.2: c105,95 r3
  circle w0.2: c105,5 r3
  circle w0.2: c5,5 r3
  circle w0.2: c5,95 r3
  lines w0.2: 6.858,74.549 6.096,73.787 6.096,69.088 7.493,67.691 ; 11.684,92.989 12.903,92.989 ; 12.268,92.431 12.268,93.497 ; 13.36,68.174 14.097,68.91 14.097,74.168 13.691,74.574 ; 16.84,92.964 18.136,92.964 ; 21.361,74.701 21.92,74.143 21.92,69.291 22.758,68.453 ; 45.466,60.503 45.466,59.563 45.568,59.461 50.418,59.461 ; 45.517,61.519 45.263,61.773 45.263,63.703 47.625,66.065 47.625,70.104 48.336,70.815 ; 56.794,65.38 56.185,64.77 56.185,61.773 56.617,61.341 58.141,61.341 ; 63.221,63.881 64.694,65.354 64.694,70.485 64.694,70.612 64.135,71.171 ; 66.904,63.729 66.904,60.122 68.022,59.004 71.323,59.004 ; 71.984,70.739 72.263,70.46 72.441,70.282 72.441,63.323 72.161,63.043 ; 73.025,60.808 73.025,58.572 73.254,58.344 78.486,58.344 ; 78.867,59.182 79.959,59.182 81.636,60.858 81.636,68.428 80.772,69.291 80.035,69.291 ; 81.28,70.637 81.94,69.977 84.379,69.977 84.861,70.46 ; 83.464,36.144 83.871,35.738 86.893,35.738 87.579,36.424 ; 83.515,55.677 84.15,55.042 87.224,55.042 87.655,55.474 ; 83.896,30.632 86.487,30.632 87.681,29.439 ; 105.994,70.51 109.728,70.51 ; 105.994,73.304 105.994,78.054 109.728,78.054 109.728,62.357 109.423,62.357 105.994,62.357 105.994,73.584 ; 107.925,62.357 107.925,78.054 ; 107.925,66.65 109.728,66.65 ; 107.925,74.371 109.728,74.371 ; 108.356,64.516 109.347,64.516 ; 108.407,72.39 109.398,72.39 ; 108.814,75.616 108.814,76.657 ; 108.839,63.983 108.839,65.024 ; 108.864,68.047 108.864,69.088 ; 108.89,71.857 108.89,72.898
  text "R-Wing" at 76.505,97.892 h1
  text "pin6- pin7+" at 68.504,93.37 h0.76
  text "pin5-  pin6+" at 50.038,93.091 h0.76
  text "L-Wing" at 43.561,92.964 h1
  text "HEAD" at 25.883,91.999 h1
  text "EVOLVER" at 92.685,88.9 h1.52
  text "MotorControl_V4.0" at 92.659,86.995 h1
  text "R-Wheel" at 107.493,71.247 h1 r90
  text "L-Wheel" at 107.518,63.17 h1 r90